# EAGLE board 2fe143d13a9057f7874dd1e763167673 (EAGLE 7.1.0)
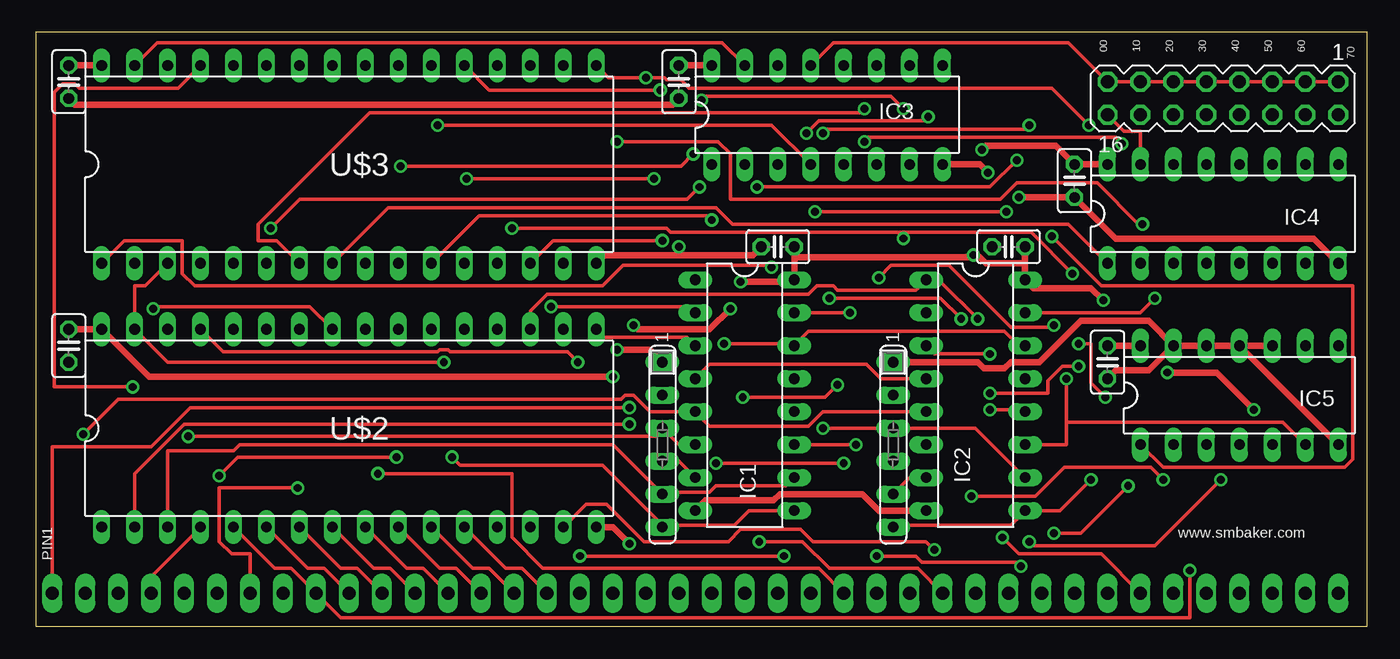
[diagram p0: board, top side]
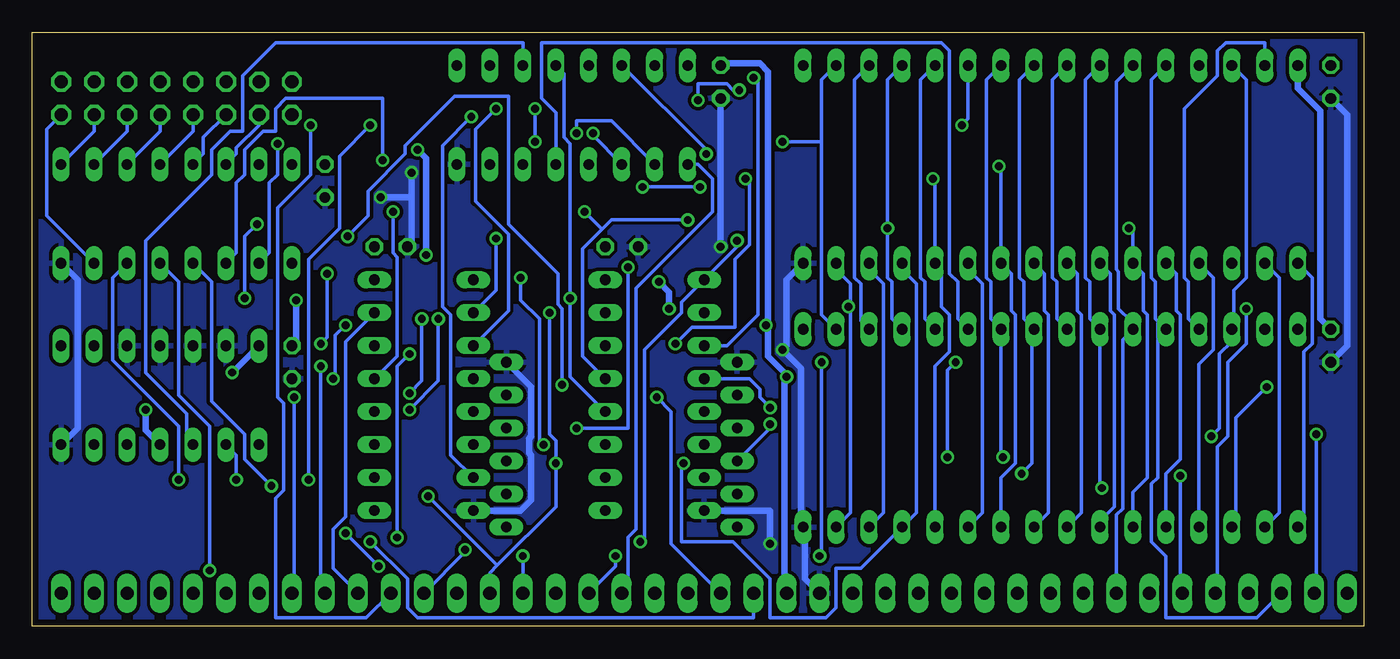
[diagram p1: board, bottom side, seen from below]

Size 102.54 x 45.71 mm. Coordinates in mm from the lower left corner, seen from the top.
Outline: 0,0 102.54,0 102.54,45.71 0,45.71 0,0
Copper layers (1*16): Top 0.035mm / dielectric 1.5mm / Bottom 0.035mm
Design rules "default *": minimum track width 10mil, minimum drill 24mil, track to track 10mil, track to pad 10mil, pad to pad 10mil, via to via 10mil, smd to smd 8mil, copper to edge 20mil, drill to drill 8mil, minimum pad ring 10mil, minimum via ring 8mil, stop-mask expansion 4mil, vias tented up to drill 25mil, thermal gap 10mil
Net classes: 1 PWR: width 0.508 mm

## Footprints (pad centres in the part's own frame; a part is rotated, then mirrored left to right if it is on the bottom)
C025-025X050 = drill 0.813 octagon: 1 -1.27,0; 2 1.27,0
DIL16 = drill 0.813 long: 1 -8.89,-3.81; 2 -6.35,-3.81; 3 -3.81,-3.81; 4 -1.27,-3.81; 5 1.27,-3.81; 6 3.81,-3.81; 7 6.35,-3.81; 8 8.89,-3.81; 9 8.89,3.81; 10 6.35,3.81; 11 3.81,3.81; 12 1.27,3.81; 13 -1.27,3.81; 14 -3.81,3.81; 15 -6.35,3.81; 16 -8.89,3.81
DIL14 = drill 0.813 long: 1 -7.62,-3.81; 2 -5.08,-3.81; 3 -2.54,-3.81; 4 0,-3.81; 5 2.54,-3.81; 6 5.08,-3.81; 7 7.62,-3.81; 8 7.62,3.81; 9 5.08,3.81; 10 2.54,3.81; 11 0,3.81; 12 -2.54,3.81; 13 -5.08,3.81; 14 -7.62,3.81
SIL6 = drill 0.813 long: 1 -6.35,0; 2 -3.81,0; 3 -1.27,0; 4 1.27,0; 5 3.81,0; 6 6.35,0
MA08-2 = drill 1.016 octagon: 1 -8.89,-1.27; 2 -8.89,1.27; 3 -6.35,-1.27; 4 -6.35,1.27; 5 -3.81,-1.27; 6 -3.81,1.27; 7 -1.27,-1.27; 8 -1.27,1.27; 9 1.27,-1.27; 10 1.27,1.27; 11 3.81,-1.27; 12 3.81,1.27; 13 6.35,-1.27; 14 6.35,1.27; 15 8.89,-1.27; 16 8.89,1.27
SIP40 = drill 1.016 long: 1 -48.26,0; 2 -45.72,0; 3 -43.18,0; 4 -40.64,0; 5 -38.1,0; 6 -35.56,0; 7 -33.02,0; 8 -30.48,0; 9 -27.94,0; 10 -25.4,0; 11 -22.86,0; 12 -20.32,0; 13 -17.78,0; 14 -15.24,0; 15 -12.7,0; 16 -10.16,0; 17 -7.62,0; 18 -5.08,0; 19 -2.54,0; 20 0,0; 21 2.54,0; 22 5.08,0; 23 7.62,0; 24 10.16,0; 25 12.7,0; 26 15.24,0; 27 17.78,0; 28 20.32,0; 29 22.86,0; 30 25.4,0; 31 27.94,0; 32 30.48,0; 33 33.02,0; 34 35.56,0; 35 38.1,0; 36 40.64,0; 37 43.18,0; 38 45.72,0; 39 48.26,0; 40 50.8,0
DIL32 = drill 0.813 long: 1 -19.05,-7.62; 2 -16.51,-7.62; 3 -13.97,-7.62; 4 -11.43,-7.62; 5 -8.89,-7.62; 6 -6.35,-7.62; 7 -3.81,-7.62; 8 -1.27,-7.62; 9 1.27,-7.62; 10 3.81,-7.62; 11 6.35,-7.62; 12 8.89,-7.62; 13 11.43,-7.62; 14 13.97,-7.62; 15 16.51,-7.62; 16 19.05,-7.62; 17 19.05,7.62; 18 16.51,7.62; 19 13.97,7.62; 20 11.43,7.62; 21 8.89,7.62; 22 6.35,7.62; 23 3.81,7.62; 24 1.27,7.62; 25 -1.27,7.62; 26 -3.81,7.62; 27 -6.35,7.62; 28 -8.89,7.62; 29 -11.43,7.62; 30 -13.97,7.62; 31 -16.51,7.62; 32 -19.05,7.62

## Placement (x,y rotation side)
C1  [C025-025X050]  2.54,41.91 270 top
C2  [C025-025X050]  2.54,21.59 270 top
C3  [C025-025X050]  49.53,41.91 270 top
C4  [C025-025X050]  57.15,29.21 180 top
C5  [C025-025X050]  74.93,29.21 180 top
C6  [C025-025X050]  80.01,34.29 270 top
C7  [C025-025X050]  82.55,20.32 270 top
IC1  74HCT670N  [DIL16]  54.61,17.78 270 top
IC2  74HCT670N  [DIL16]  72.39,17.78 270 top
IC3  74HCT139N  [DIL16]  60.96,39.37 0 top
IC4  74HCT138N  [DIL16]  91.44,31.75 0 top
IC5  74HCT74N  [DIL14]  92.71,17.78 0 top
RN1  [SIL6]  66.04,13.97 270 top
RN2  [SIL6]  48.26,13.97 270 top
SV1  [MA08-2]  91.44,40.64 180 top
U$1  RC2014  [SIP40]  49.53,2.54 0 top
U$2  AS6C4008  [DIL32]  24.13,15.24 0 top
U$3  39SF040  [DIL32]  24.13,35.56 0 top

## Library data of the parts
C1-C7 = resistor
IC1-IC5 = 74xx-eu
RN1 RN2 = resistor-sil; OC_FARNELL: unknown; OC_NEWARK: unknown
SV1 = con-lstb; OC_FARNELL: unknown; OC_NEWARK: unknown
U$1-U$3 = scott

## Nets
!IOREQ: IC4.4 U$1.26
!MREQ: IC3.1 U$1.23
!PG_EN: IC3.11 IC5.3
!PG_WR: IC1.12 IC2.12 IC3.12
!RD: U$1.25 U$2.24 U$3.24
!RESET: IC5.1 U$1.20
!WR: IC3.15 U$1.24 U$2.29 U$3.31
+5V [PWR]: C1.1 C2.1 C3.1 C4.1 C5.1 C6.1 C7.1 IC1.16 IC2.16 IC3.16 IC4.16 IC5.4 IC5.14 U$1.18 U$2.32 U$3.32
A0: IC1.14 IC2.14 U$1.16 U$2.12 U$3.12
A1: IC1.13 IC2.13 U$1.15 U$2.11 U$3.11
A2: IC3.14 U$1.14 U$2.10 U$3.10
A3: U$1.13 U$2.9 U$3.9
A4: IC4.1 U$1.12 U$2.8 U$3.8
A5: IC4.2 U$1.11 U$2.7 U$3.7
A6: IC4.3 U$1.10 U$2.6 U$3.6
A7: IC4.5 U$1.9 U$2.5 U$3.5
A8: U$1.8 U$2.27 U$3.27
A9: U$1.7 U$2.26 U$3.26
A10: U$1.6 U$2.23 U$3.23
A11: U$1.5 U$2.25 U$3.25
A12: U$1.4 U$2.4 U$3.4
A13: U$1.3 U$2.28 U$3.28
A14: IC1.5 IC2.5 U$1.2
A15: IC1.4 IC2.4 U$1.1
D0: IC1.15 IC5.2 U$1.27 U$2.13 U$3.13
D1: IC1.1 U$1.28 U$2.14 U$3.14
D2: IC1.2 U$1.29 U$2.15 U$3.15
D3: IC1.3 U$1.30 U$2.17 U$3.17
D4: IC2.15 U$1.31 U$2.18 U$3.18
D5: IC2.1 U$1.32 U$2.19 U$3.19
D6: IC2.2 U$1.33 U$2.20 U$3.20
D7: IC2.3 U$1.34 U$2.21 U$3.21
GND [PWR]: C1.2 C2.2 C3.2 C4.2 C5.2 C6.2 C7.2 IC1.8 IC2.8 IC3.8 IC4.8 IC5.7 IC5.10 IC5.11 IC5.12 IC5.13 RN1.1 RN2.1 U$1.17 U$2.16 U$3.16
M1: IC4.6 U$1.19
MA14: IC1.10 RN2.5 U$2.3 U$3.29
MA15: IC1.9 RN2.6 U$2.31 U$3.3
MA16: IC1.7 RN2.4 U$2.2 U$3.2
MA17: IC1.6 RN2.3 U$2.30 U$3.30
MA18: IC2.10 RN1.3 U$2.1 U$3.1
MA19: IC2.9 IC3.2 RN1.6
MA20: IC2.7 IC3.3 RN1.5
N$4: IC4.7 SV1.2
N$5: IC4.9 SV1.4
N$6: IC4.10 SV1.6
N$7: IC4.11 SV1.8
N$8: IC4.12 SV1.10
N$9: IC4.13 SV1.12
N$10: IC4.14 SV1.14
N$11: IC4.15 SV1.16
N$12: IC3.13 SV1.1 SV1.3 SV1.5 SV1.7 SV1.9 SV1.11 SV1.13 SV1.15
N$13: IC1.11 IC2.11 IC5.6
RAM_CS: IC3.5 U$2.22
ROM_CS: IC3.4 U$3.22

## Tracks (layer width: path | path; a pad name or v marks a point on that pad's centre or on a via)
!IOREQ  (via drill 0.61)
  Top 0.254: v84.14,10.79 80.49,7.14 v78.42,7.14 | v75.88,4.6 75.56,4.92 68.26,4.92 67.79,5.4 v64.77,5.4
  Bottom 0.254: IC4.4 88.74,26.51 88.74,17.3 86.2,14.76 86.2,12.86 v84.14,10.79 | v75.88,4.6 v78.42,7.14 | U$1.26 v64.77,5.4
!MREQ
  Bottom 0.254: IC3.1 51.28,35.56 50.16,34.45 50.16,31.91 56.04,26.04 56.04,7.46 56.67,6.83 56.67,3.02 U$1.23
!PG_EN
  Bottom 0.254: IC5.3 90.65,14.45 90.65,16.35 93.82,19.53 93.82,29.69 88.74,34.77 88.74,36.67 87.31,38.1 86.36,38.1 86.36,42.39 83.82,44.93 64.77,44.93 IC3.11
!PG_WR  (via drill 0.61)
  Top 0.254: IC2.12 76.04,16.67 v73.5,16.67 | v71.28,23.65 69.69,25.24 v61.12,25.24
  Bottom 0.254: IC1.12 61.12,19.21 v61.12,25.24 61.12,37.15 61.59,37.62 61.59,42.55 IC3.12 | v73.5,16.67 71.28,18.89 v71.28,23.65
!RD  (via drill 0.61)
  Top 0.254: U$1.25 60.33,4.45 39.05,4.45 36.67,6.83 36.67,11.75 v26.35,11.75
  Bottom 0.254: U$3.24 26.51,42.07 26.51,26.83 26.19,26.51 26.19,23.65 U$2.24 25.56,22.86 25.56,12.54 v26.35,11.75
!RESET  (via drill 0.61)
  Top 0.254: IC5.1 86.84,12.22 100.81,12.22 101.44,12.86 101.44,26.19 82.07,26.19 v78.26,30 | v61.75,18.57 60.8,17.62 v54.45,17.62
  Bottom 0.254: v78.26,30 76.68,31.59 76.68,33.5 73.82,36.35 73.82,36.99 70.01,40.8 65.88,40.8 65.88,30.96 62.07,27.15 62.07,24.77 61.75,24.45 v61.75,18.57 | v54.45,17.62 53.34,16.51 53.34,6.35 U$1.20
!WR  (via drill 0.61)
  Top 0.254: IC3.15 52.86,44.93 9.37,44.93 U$3.31 | v41.91,5.4 v57.63,5.4 | v41.75,20.32 40.96,21.11 31.91,21.11 31.75,21.27 31.11,21.27 30.96,21.11 14.45,21.11 U$2.29
  Bottom 0.254: U$2.29 13.49,23.65 13.49,26.51 13.81,26.83 13.81,39.85 11.27,42.39 11.27,44.29 10.64,44.93 7.62,44.93 U$3.31 | U$1.24 57.63,4.6 v57.63,5.4 | v41.91,5.4 41.75,5.56 v41.75,20.32
+5V  (via drill 0.61)
  Top 0.508: IC5.14 C7.1 | v93.82,16.67 90.96,19.53 v87.15,19.53 | IC4.16 C6.1 78.58,36.99 73.18,36.99 v72.87,36.67 | C4.1 58.42,28.42 | 58.42,28.42 IC1.16 58.26,26.51 v54.29,26.51 | C5.1 76.2,27.94 | 76.2,27.94 IC2.16 76.83,26.04 81.28,26.04 v82.23,25.08 | 72.23,28.42 72.71,28.42 73.18,27.94 76.2,27.94 | 72.23,28.42 58.42,28.42 | v72.23,28.57 72.23,28.42 | C2.1 U$2.32 8.73,19.21 v44.45,19.21 | U$3.32 C1.1 | IC3.16 C3.1 | v53.5,24.45 51.91,22.86 46.35,22.86 v46.04,23.18
  Bottom 0.508: IC5.4 93.82,15.08 v93.82,16.67 | IC5.14 v87.15,19.53 | v72.87,36.67 72.23,36.04 v72.23,28.57 | C7.1 82.23,21.91 v82.23,25.08 | C2.1 3.33,23.65 3.33,39.69 5.08,41.43 U$3.32 | U$1.18 44.61,2.7 44.61,19.21 | 44.61,19.21 44.61,19.53 45.88,20.8 45.88,23.18 | 45.88,23.18 45.88,42.7 46.51,43.34 49.53,43.34 C3.1 | v44.45,19.21 44.61,19.21 | v54.29,26.51 53.5,25.72 v53.5,24.45 | v46.04,23.18 45.88,23.18
A0  (via drill 0.61)
  Top 0.254: IC2.14 75.72,21.59 74.61,22.7 59.53,22.7 IC1.14 58.42,21.75 v53.02,21.75 | U$2.12 36.2,4.45 37.47,4.45 U$1.16 | v33.18,34.45 v47.62,34.45
  Bottom 0.254: U$2.12 33.02,20 31.91,21.11 31.91,23.97 32.54,24.61 32.54,27.46 U$3.12 33.02,34.29 v33.18,34.45 | v53.02,21.75 51.75,23.02 48.42,23.02 48.42,28.26 47.31,29.37 47.31,34.13 v47.62,34.45
A1  (via drill 0.61)
  Top 0.254: U$2.11 33.66,4.45 34.92,4.45 U$1.15 | v52.07,31.27 51.75,31.59 34.13,31.59 U$3.11 | v60.01,31.91 v74.77,31.91
  Bottom 0.254: IC1.13 60.17,20.8 60.17,29.05 58.66,30.56 | 58.66,30.56 57.94,31.27 v52.07,31.27 | IC2.13 74.45,20.8 74.45,28.42 74.77,28.73 v74.77,31.91 | 58.66,30.56 v60.01,31.91 | U$2.11 29.37,8.73 29.37,26.35 30.48,27.46 U$3.11
A2  (via drill 0.61)
  Top 0.254: U$2.10 31.11,4.45 32.38,4.45 U$1.14 | v50.64,36.35 49.69,35.4 v28.1,35.4
  Bottom 0.254: U$2.10 27.94,11.43 26.83,12.54 26.83,23.97 27.15,24.29 27.15,27.15 U$3.10 27.94,35.24 v28.1,35.4 | IC3.14 50.64,36.67 v50.64,36.35
A3
  Top 0.254: U$2.9 28.57,4.45 29.84,4.45 U$1.13
  Bottom 0.254: U$3.9 24.61,27.15 24.61,24.29 24.29,23.97 24.29,8.73 U$2.9
A4
  Top 0.254: U$2.8 26.04,4.45 27.3,4.45 U$1.12 | IC4.1 79.53,30.96 53.66,30.96 52.39,32.23 27.15,32.23 U$3.8
  Bottom 0.254: U$3.8 22.07,27.15 22.07,24.29 21.75,23.97 21.75,8.73 U$2.8
A5  (via drill 0.61)
  Top 0.254: U$2.7 23.5,4.45 24.77,4.45 U$1.11 | v83.66,37.15 83.19,37.62 64.14,37.62 v63.82,37.31 | v63.82,39.85 63.5,39.53 25.72,39.53 17.14,30.96 17.14,29.69 18.57,29.69 U$3.7
  Bottom 0.254: U$3.7 19.53,27.15 19.53,24.29 19.21,23.97 19.21,9.21 20.32,8.1 U$2.7 | IC4.2 84.3,28.73 84.3,34.13 83.66,34.77 v83.66,37.15 | v63.82,39.85 v63.82,37.31
A6  (via drill 0.61)
  Top 0.254: U$2.6 20.95,4.45 22.23,4.45 U$1.10 | v75.56,35.88 73.5,33.81 v55.56,33.81 | v51.12,33.81 50.16,32.86 20.32,32.86 v18.1,30.64
  Bottom 0.254: U$2.6 17.78,10.32 16.67,11.43 16.67,23.97 16.99,24.29 16.99,27.15 U$3.6 17.78,30.32 v18.1,30.64 | IC4.3 86.84,28.73 86.84,34.13 86.2,34.77 86.2,36.67 84.77,38.1 83.82,38.1 83.82,39.85 83.03,40.64 75.56,40.64 v75.56,35.88 | v51.12,33.81 v55.56,33.81
A7  (via drill 0.61)
  Top 0.254: U$2.5 18.41,4.45 19.68,4.45 U$1.9 23.5,0.64 88.9,0.64 v88.9,4.29
  Bottom 0.254: U$3.5 14.45,27.15 14.45,24.29 14.13,23.97 14.13,12.86 15.24,11.75 U$2.5 | IC4.5 91.28,26.51 91.28,17.78 88.9,15.4 v88.9,4.29
A8
  Bottom 0.254: U$1.8 19.05,8.57 18.57,9.05 18.57,22.07 U$2.27 17.94,22.86 17.94,23.5 18.89,24.45 18.89,27.3 19.05,27.46 19.05,41.91 U$3.27
A9  (via drill 0.61)
  Top 0.254: U$1.7 16.51,5.56 15.08,5.56 14.13,6.51 14.13,10.64 v20.16,10.64
  Bottom 0.254: U$3.26 21.43,42.07 21.43,26.83 21.11,26.51 21.11,23.65 U$2.26 20.32,10.79 v20.16,10.64
A10  (via drill 0.61)
  Top 0.254: v14.13,11.59 15.56,13.02 v27.78,13.02
  Bottom 0.254: U$3.23 29.05,42.07 29.05,26.83 28.73,26.51 28.73,23.65 U$2.23 27.94,13.18 v27.78,13.02 | U$1.6 14.13,2.7 v14.13,11.59
A11  (via drill 0.61)
  Top 0.254: v9.05,24.45 9.21,24.61 21.11,24.61 U$2.25
  Bottom 0.254: U$2.25 23.65,23.65 23.65,26.51 23.97,26.83 23.97,42.07 U$3.25 | U$1.5 11.27,2.7 11.27,13.81 10.48,14.61 10.48,20.32 9.05,21.75 v9.05,24.45
A12
  Top 0.254: U$2.4 8.89,3.81 U$1.4
  Bottom 0.254: U$3.4 11.59,26.83 11.59,21.27 12.7,20.16 U$2.4
A13
  Bottom 0.254: U$3.28 16.35,42.07 16.35,26.83 16.03,26.51 16.03,23.65 U$2.28 15.88,23.34 15.88,11.43 16.35,10.95 16.35,6.51 15.24,5.4 15.24,0.64 8.26,0.64 U$1.3
A14  (via drill 0.61)
  Top 0.254: IC2.5 60.64,16.51 59.53,15.4 51.91,15.4 IC1.5 47.31,16.51 46.04,17.78 45.4,17.78 45.09,17.46 6.35,17.46 v3.65,14.76
  Bottom 0.254: U$1.2 3.65,2.7 v3.65,14.76
A15  (via drill 0.61)
  Top 0.254: IC1.4 51.91,20.16 63.98,20.16 65.09,19.05 IC2.4 | U$1.1 1.27,13.81 8.89,13.81 11.91,16.83 v45.72,16.83
  Bottom 0.254: v45.72,16.83 46.51,17.62 46.51,18.26 47.31,19.05 IC1.4
D0  (via drill 0.61)
  Top 0.254: v62.71,24.13 IC1.15 | v86.84,11.27 85.88,12.22 79.22,12.22 76.99,10 v72.07,10 | v62.23,12.54 v52.39,12.54
  Bottom 0.254: U$3.13 35.56,27.46 34.45,26.35 34.45,8.73 U$2.13 38.73,4.45 40.64,4.45 40.64,1.43 41.43,0.64 45.72,0.64 45.72,3.65 48.58,6.51 52.55,6.51 52.55,12.38 v52.39,12.54 | v62.71,24.13 62.71,14.76 62.23,14.29 v62.23,12.54 62.23,9.21 66.75,4.68 | 66.75,4.68 67.31,4.13 U$1.27 | IC5.2 86.84,13.18 v86.84,11.27 | 66.75,4.68 v72.07,10
D1  (via drill 0.61)
  Top 0.254: v48.26,29.69 39.85,29.69 U$3.14 | U$1.28 67.94,4.45 61.12,4.45 59.05,6.51 v55.72,6.51
  Bottom 0.254: U$2.14 36.99,8.73 36.99,26.35 38.1,27.46 U$3.14 | v48.26,29.69 48.26,29.21 IC1.1 52.55,24.92 52.55,24.13 55.4,21.27 55.4,6.83 v55.72,6.51
D2  (via drill 0.61)
  Top 0.254: IC1.2 50.32,24.61 v39.69,24.61 | v69.22,5.87 68.58,6.51 59.85,6.51 58.9,7.46 54.29,7.46 53.34,6.51 46.83,6.51 43.97,9.37 42.39,9.37 U$2.15
  Bottom 0.254: U$2.15 39.53,8.73 39.53,24.61 | 39.53,24.61 39.53,26.35 40.64,27.46 U$3.15 | 39.53,24.61 v39.69,24.61 | U$1.29 69.22,5.71 v69.22,5.87
D3  (via drill 0.61)
  Top 0.254: IC1.3 50.16,22.23 43.81,22.23 U$2.17 | U$3.17 44.13,42.23 v46.99,42.23 48.42,42.23 48.58,42.07 49.69,42.07 50.32,41.43 78.26,41.43 v81.12,38.58
  Bottom 0.254: v46.99,42.23 46.67,41.91 46.67,23.97 49.05,21.59 IC1.3 | U$1.30 76.83,0.64 83.82,0.64 83.82,9.84 83.19,10.48 83.19,17.14 83.66,17.62 83.66,32.23 81.12,34.77 v81.12,38.58
D4  (via drill 0.61)
  Top 0.254: v44.77,37.31 52.55,37.31 53.5,36.35 53.5,32.86 74.3,32.86 75.56,34.13 81.76,34.13 84.93,30.96 v85.25,30.96 | v86.2,25.24 85.09,24.13 IC2.15
  Bottom 0.254: U$2.18 41.75,23.97 41.75,37.31 | 41.75,37.31 41.75,42.07 U$3.18 | IC2.15 78.42,21.91 78.42,8.41 79.38,7.46 79.38,4.45 U$1.31 | v44.77,37.31 41.75,37.31 | v85.25,30.96 86.2,30 v86.2,25.24
D5  (via drill 0.61)
  Top 0.254: U$2.19 38.1,24.29 39.37,25.56 59.53,25.56 60.17,26.19 61.44,26.19 61.75,25.88 67.79,25.88 IC2.1 68.58,26.51 69.69,26.51 v72.55,23.65 | v80.33,20 79.06,20 77.95,18.89 77.95,17.94 v73.5,17.94
  Bottom 0.254: U$2.19 38.73,23.5 38.73,26.35 39.21,26.83 39.21,42.07 U$3.19 | U$1.32 80.33,2.86 v80.33,20 | v73.5,17.94 72.55,18.89 v72.55,23.65
D6  (via drill 0.61)
  Top 0.254: 66.44,30.24 66.36,30.32 48.9,30.32 48.58,30.64 v36.67,30.64 | 66.44,30.24 v66.83,29.84 | v82.39,17.62 81.28,18.73 81.28,21.75 v80.33,21.75 | v79.85,27.15 76.68,30.32 66.52,30.32 66.44,30.24
  Bottom 0.254: U$2.20 36.35,23.65 36.35,26.51 36.67,26.83 v36.67,30.64 36.67,42.07 U$3.20 | IC2.2 66.83,25.88 v66.83,29.84 | U$1.33 82.39,2.7 v82.39,17.62 | v80.33,21.75 79.85,22.23 v79.85,27.15
D7  (via drill 0.61)
  Top 0.254: IC2.3 69.22,20.95 v73.5,20.95 | v74.45,6.83 75.72,5.56 82.07,5.56 U$1.34 | U$3.21 34.92,41.27 v48.1,41.27 | v51.28,40.48 51.59,40.8 65.88,40.8 v66.83,39.85
  Bottom 0.254: U$2.21 33.81,23.65 33.81,26.51 34.13,26.83 34.13,42.07 U$3.21 | v73.5,20.95 74.45,20 v74.45,6.83 | v48.1,41.27 48.58,41.27 49.05,41.75 51.28,41.75 v51.28,40.48 | v66.83,39.85 68.42,38.26 68.42,32.7 65.88,30.16 65.88,24.29 IC2.3
GND  (via drill 0.61)
  Top 0.508: IC1.8 51.59,9.68 56.83,9.68 57.31,10.16 63.66,10.16 64.93,8.89 IC2.8 | v73.34,34.92 72.71,35.56 IC3.8 | C7.2 83.19,19.68 85.72,19.68 IC5.13 | IC5.13 IC5.12 IC5.11 | IC5.11 IC5.10 | IC5.11 IC5.7 | IC4.8 98.42,29.84 83.19,29.84 C6.2 v75.72,33.02 | RN1.1 72.55,20.32 73.03,19.84 74.61,19.84 75.09,20.32 77.31,20.32 80.49,23.5 85.72,23.5 IC5.13 | U$3.16 43.81,28.57 49.53,28.57 | 49.53,28.57 55.24,28.57 C4.2 | RN2.1 47.31,21.27 v44.77,21.27 | 49.53,28.57 v49.53,29.21 | C1.2 3.02,40.16 49.05,40.16 C3.2 | v45.72,6.35 44.45,7.62 U$2.16
  Bottom 0.508: RN1.1 64.14,18.41 64.14,14.61 64.29,14.45 64.29,13.34 64.14,13.18 64.14,9.68 64.93,8.89 IC2.8 | C5.2 73.34,29.53 73.34,33.02 | v73.34,34.92 73.34,33.02 | IC4.8 99.06,26.67 99.06,15.24 IC5.7 | v75.72,33.02 73.34,33.02 | C2.2 1.27,21.59 1.27,39.37 C1.2 | U$1.17 43.02,3.65 43.02,7.46 U$2.16 43.34,7.78 43.34,19.84 v44.77,21.27 44.45,21.59 44.45,26.67 U$3.16 | v49.53,29.21 C3.2 | IC1.8 45.72,8.89 v45.72,6.35
  pour Bottom: 0,0 102.87,0 102.87,45.72 0,45.72
M1  (via drill 0.61)
  Top 0.254: v91.28,11.27 86.2,6.19 76.83,6.19 v76.52,6.51
  Bottom 0.254: IC4.6 96.36,26.83 96.36,20.48 91.28,15.4 v91.28,11.27 | v76.52,6.51 73.66,3.65 73.66,1.43 72.87,0.64 46.99,0.64 U$1.19
MA14  (via drill 0.61)
  Top 0.254: U$2.3 10.16,13.49 15.24,13.49 15.72,13.97 44.45,13.97 RN2.5 48.26,10.32 51.91,10.32 52.39,10.79 57.78,10.79 IC1.10 | U$3.29 10.95,41.43 3.33,41.43 3.02,41.75 2.06,41.75 1.43,41.12 1.43,18.41 v7.46,18.41
  Bottom 0.254: v7.46,18.41 9.84,16.03 9.84,7.94 U$2.3
MA15  (via drill 0.61)
  Top 0.254: U$3.3 8.41,26.19 7.62,26.19 U$2.31 10.16,20.32 v31.43,20.32 | IC1.9 54.93,8.89 53.82,7.78 48.42,7.78 RN2.6 48.26,7.78 43.66,12.38 32.7,12.38 v32.07,13.02
  Bottom 0.254: v31.43,20.32 32.07,19.68 v32.07,13.02
MA16  (via drill 0.61)
  Top 0.254: IC1.7 49.53,12.7 RN2.4 | v45.72,15.56 11.43,15.56 7.62,11.75 U$2.2
  Bottom 0.254: U$2.2 6.51,8.73 6.51,26.83 U$3.2 | RN2.4 45.72,15.24 v45.72,15.56
MA17  (via drill 0.61)
  Top 0.254: IC1.6 49.53,13.97 RN2.3 48.26,15.08 47.78,14.61 v11.75,14.61
  Bottom 0.254: U$3.30 9.05,42.07 9.05,26.83 10,25.88 10,23.02 U$2.30 10.16,21.91 11.11,20.95 11.11,15.24 v11.75,14.61
MA18  (via drill 0.61)
  Top 0.254: IC2.10 72.39,15.24 RN1.3 v60.64,15.24 | v56.67,27.62 56.52,27.78 45.24,27.78 43.66,26.19 12.22,26.19 11.27,27.15 11.27,29.69 6.83,29.69 U$3.1
  Bottom 0.254: U$2.1 4.6,8.1 4.6,21.11 3.97,21.75 3.97,26.83 U$3.1 | v60.64,15.24 56.67,15.24 v56.67,27.62
MA19  (via drill 0.61)
  Top 0.254: RN1.6 66.2,7.78 75.09,7.78 IC2.9 78.9,8.89 v81.28,11.27 | v60.64,37.94 60.96,38.26 76.2,38.26 v76.52,38.58
  Bottom 0.254: IC3.2 57.94,38.89 60.64,38.89 v60.64,37.94 | v76.52,38.58 78.9,36.2 78.9,30.64 81.28,28.26 v81.28,11.27
MA20  (via drill 0.61)
  Top 0.254: RN1.5 67.31,11.43 IC2.7 | v59.37,37.94 60.33,38.89 68.42,38.89 v68.74,39.21
  Bottom 0.254: IC3.3 59.37,37.78 v59.37,37.94 | v68.74,39.21 70.96,36.99 70.96,24.61 70.33,23.97 70.33,13.18 IC2.7
N$4
  Bottom 0.254: IC4.7 101.44,31.59 101.44,38.26 SV1.2
N$5
  Bottom 0.254: IC4.9 97.79,38.1 SV1.4
N$6
  Bottom 0.254: IC4.10 95.25,38.1 SV1.6
N$7
  Bottom 0.254: IC4.11 92.71,38.1 SV1.8
N$8
  Bottom 0.254: IC4.12 90.17,38.1 SV1.10
N$9
  Bottom 0.254: IC4.13 89.38,36.35 89.38,37.62 SV1.12
N$10
  Bottom 0.254: IC4.14 86.84,36.35 86.84,36.83 85.09,38.58 SV1.14
N$11
  Top 0.254: IC4.15 85.09,38.1 83.82,38.1 SV1.16
N$12
  Top 0.254: IC3.13 61.44,44.93 79.53,44.93 SV1.15 SV1.13 SV1.11 SV1.9 SV1.7 SV1.5 SV1.3 SV1.1
N$13  (via drill 0.61)
  Top 0.254: v63.18,13.97 IC1.11 | v64.93,26.83 65.88,27.78 70.33,27.78 75.09,23.02 78.26,23.02 v78.42,23.18 | 79.38,15.72 79.38,13.97 IC2.11 | 79.38,15.72 v79.38,19.05 | IC5.6 96.04,15.72 79.38,15.72
  Bottom 0.254: v63.18,13.97 63.5,14.29 63.5,23.65 64.93,25.08 v64.93,26.83 | v78.42,23.18 79.22,22.38 79.22,19.21 v79.38,19.05
RAM_CS
  Bottom 0.254: U$2.22 31.27,23.65 31.27,26.51 31.91,27.15 31.91,44.29 32.54,44.93 63.34,44.93 63.34,40.64 62.23,39.53 IC3.5
ROM_CS  (via drill 0.61)
  Top 0.254: IC3.4 56.67,38.58 v30.96,38.58
  Bottom 0.254: v30.96,38.58 30.48,39.05 U$3.22

## Text on the board
tPlace: 00 | 10 | 20 | 30 | 40 | 50 | 60 | 70 | www.smbaker.com | PIN1